# Altium PCB MB_Backup.PcbDoc
Units mm, origin at the board's own origin, x right, y up, seen from the top; angles counter-clockwise.
Board outline 160 x 154 mm, 2 copper layers (Top Layer, Bottom Layer); 49 components, 74 nets, 364 pads, 107 vias.
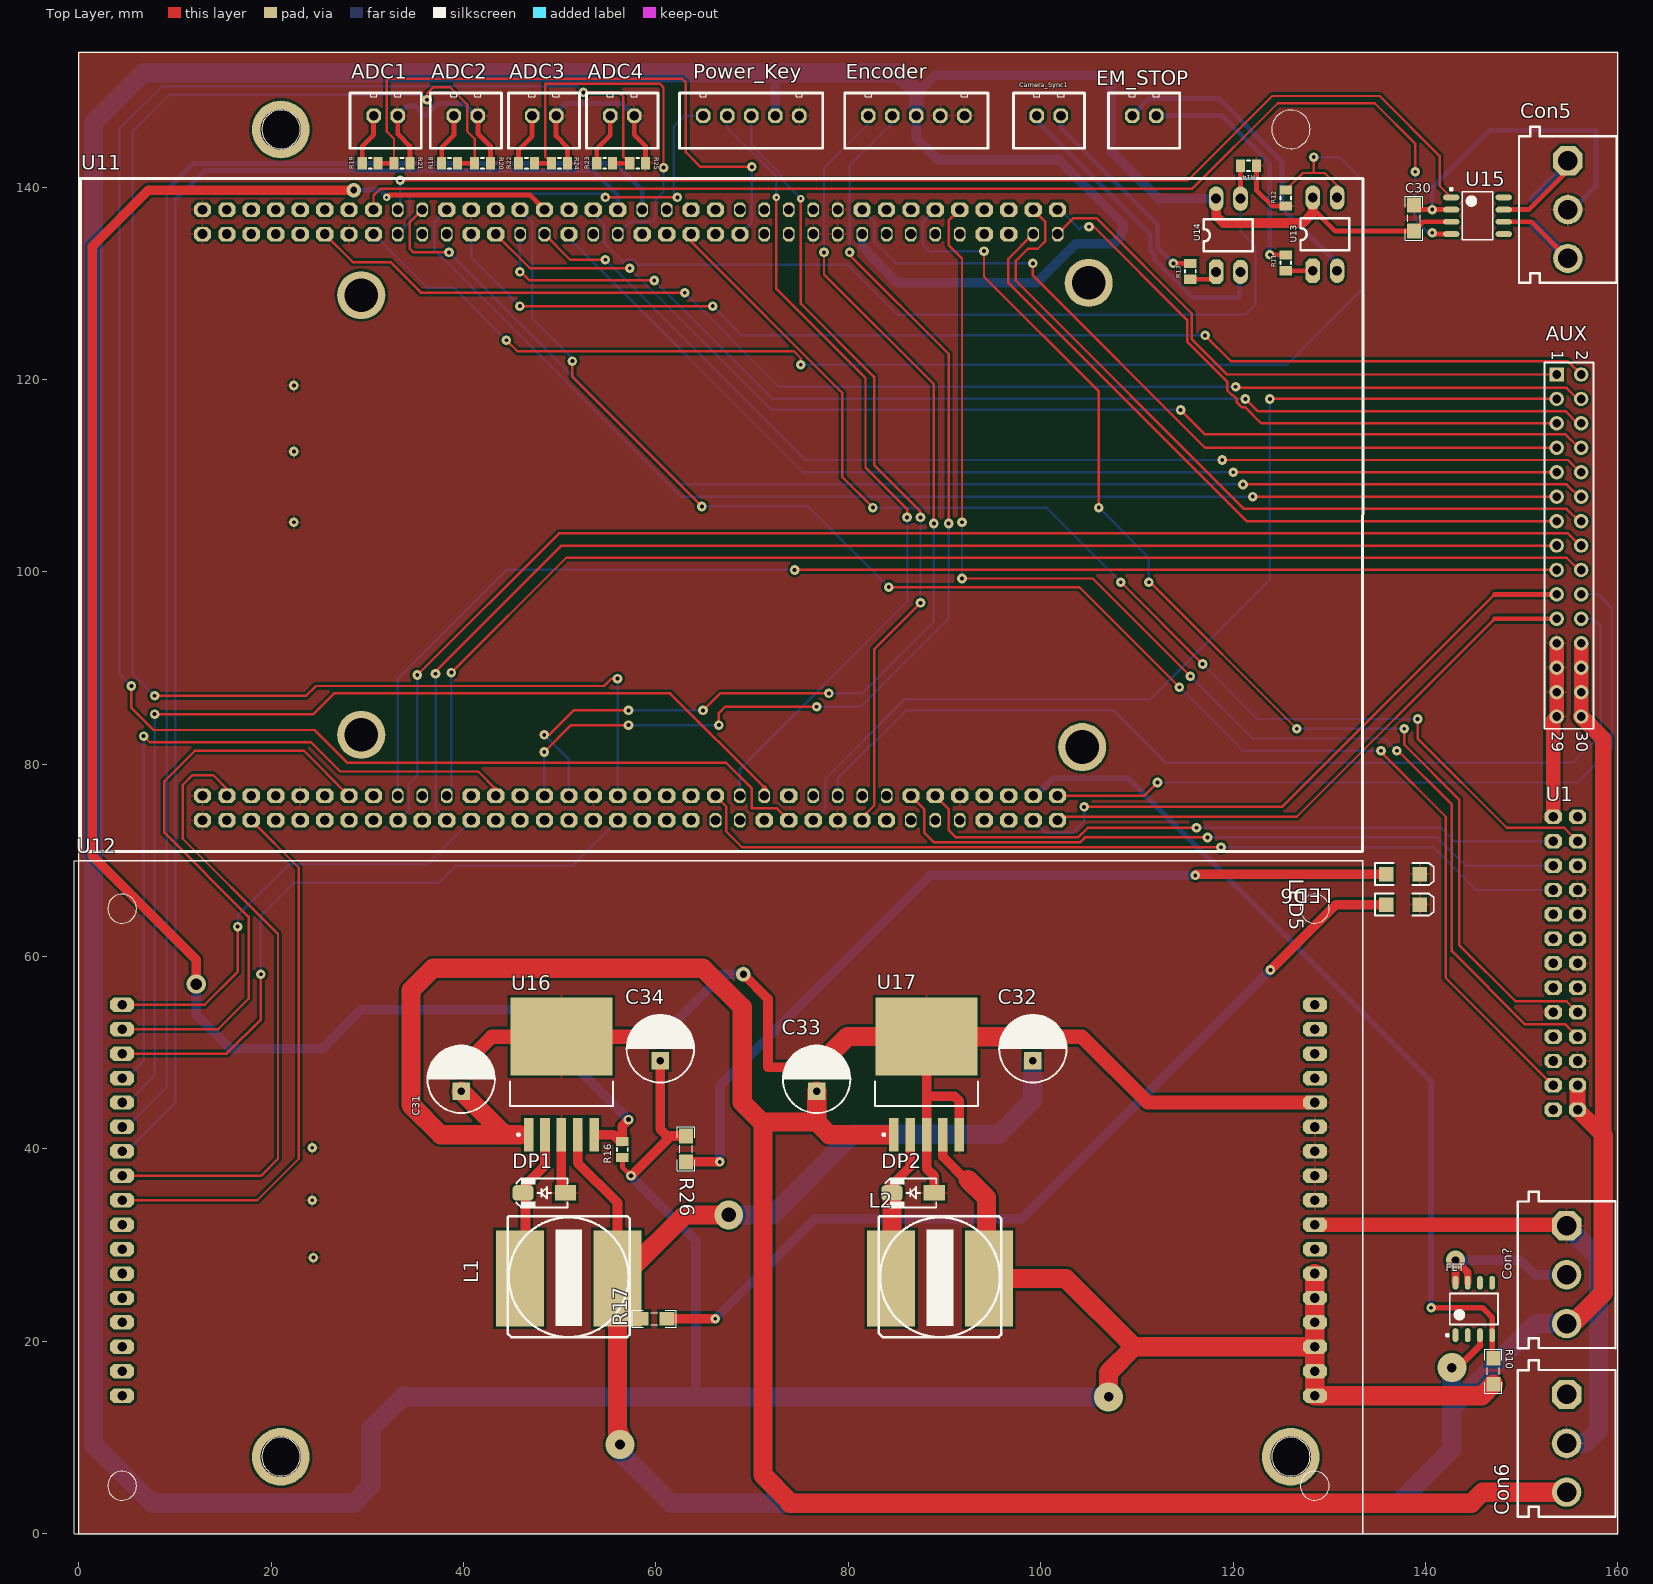
[diagram p0: Top Layer view]
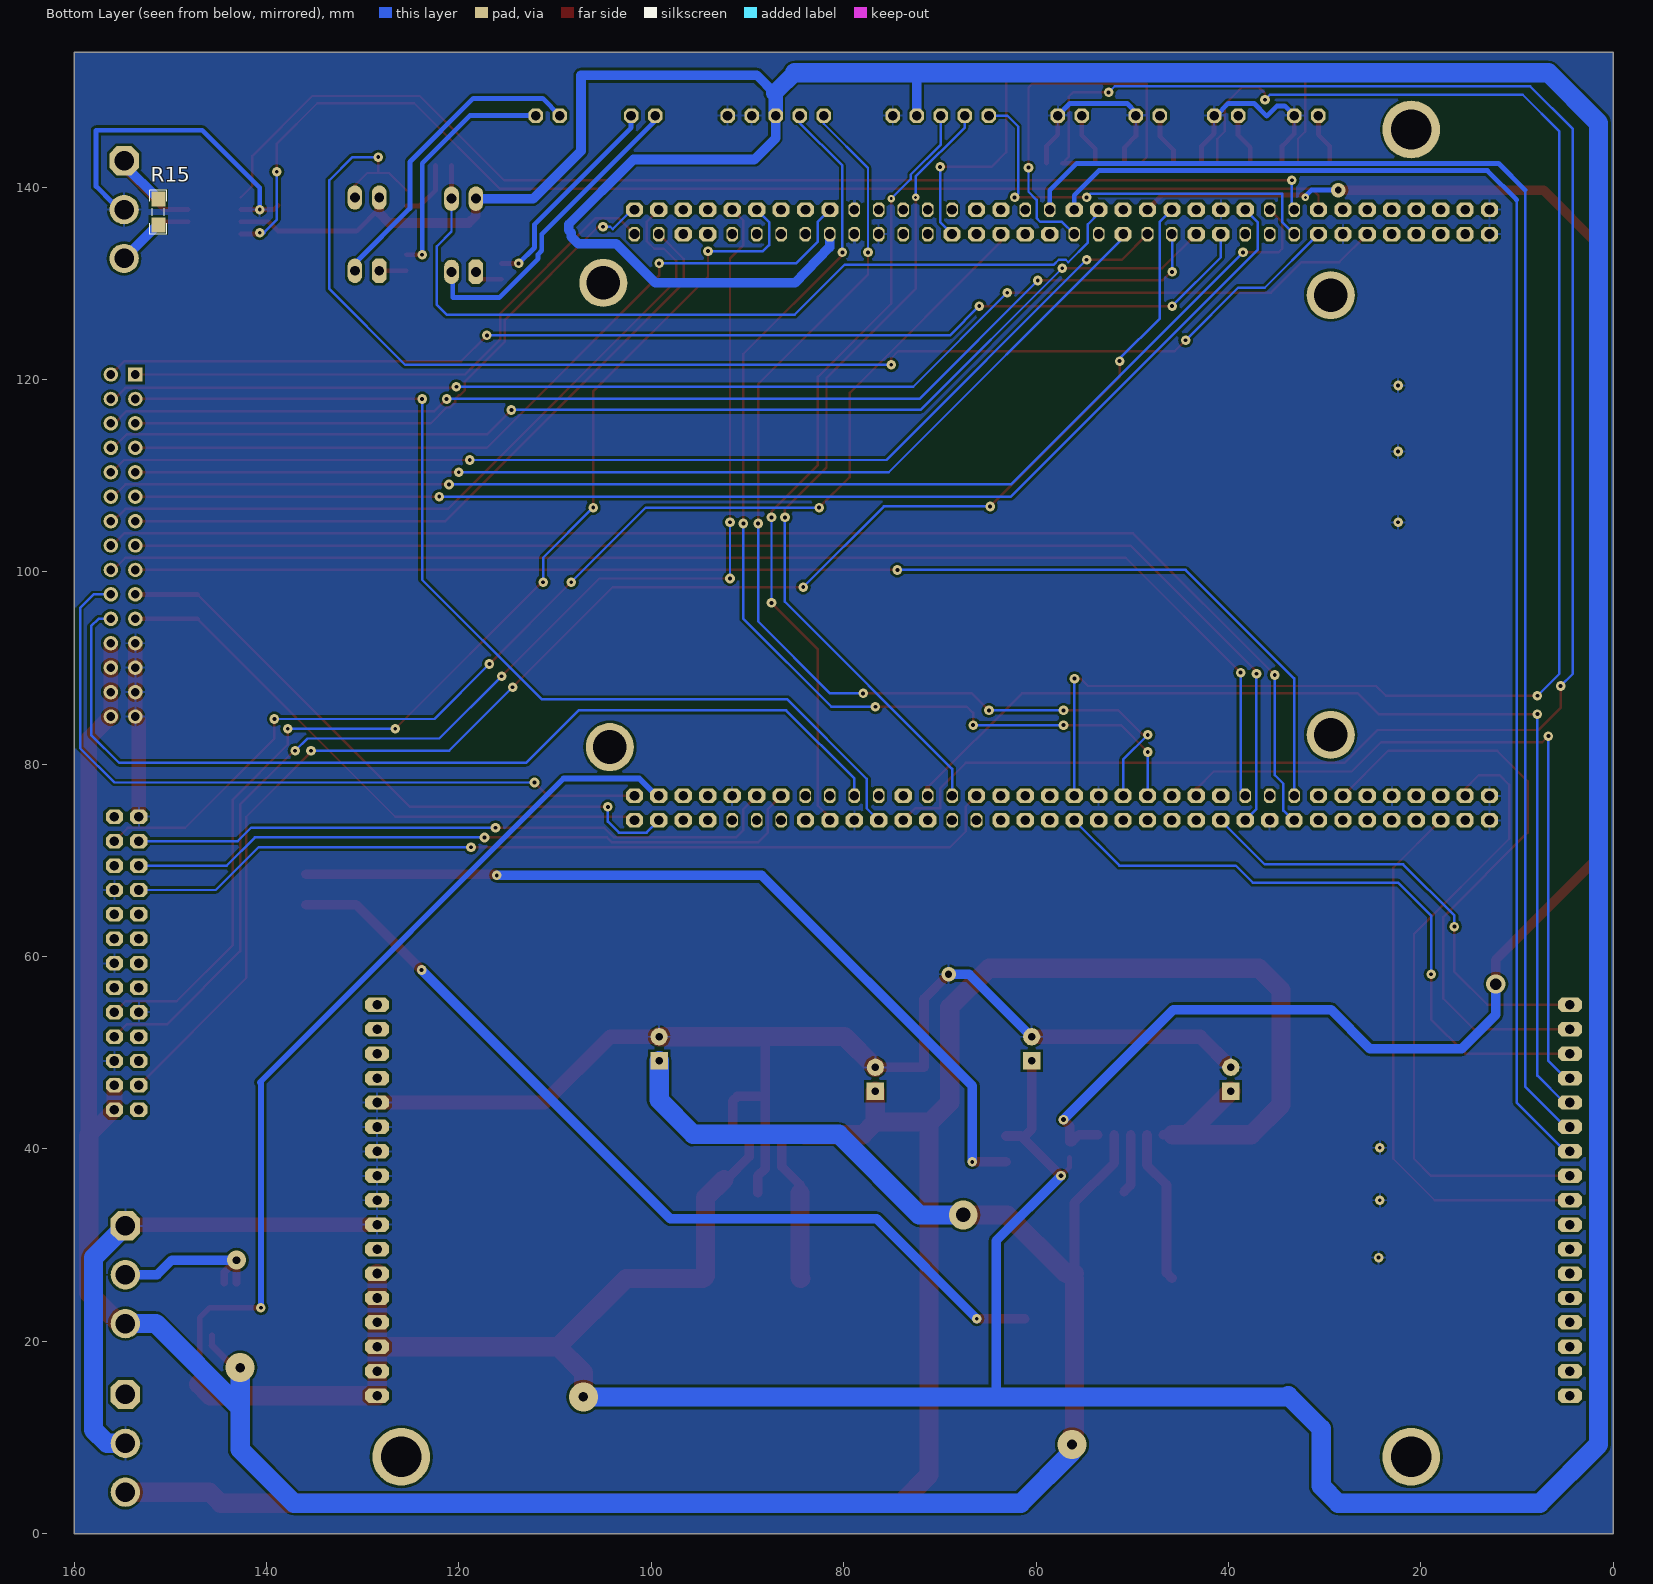
[diagram p1: Bottom Layer view, seen from below]
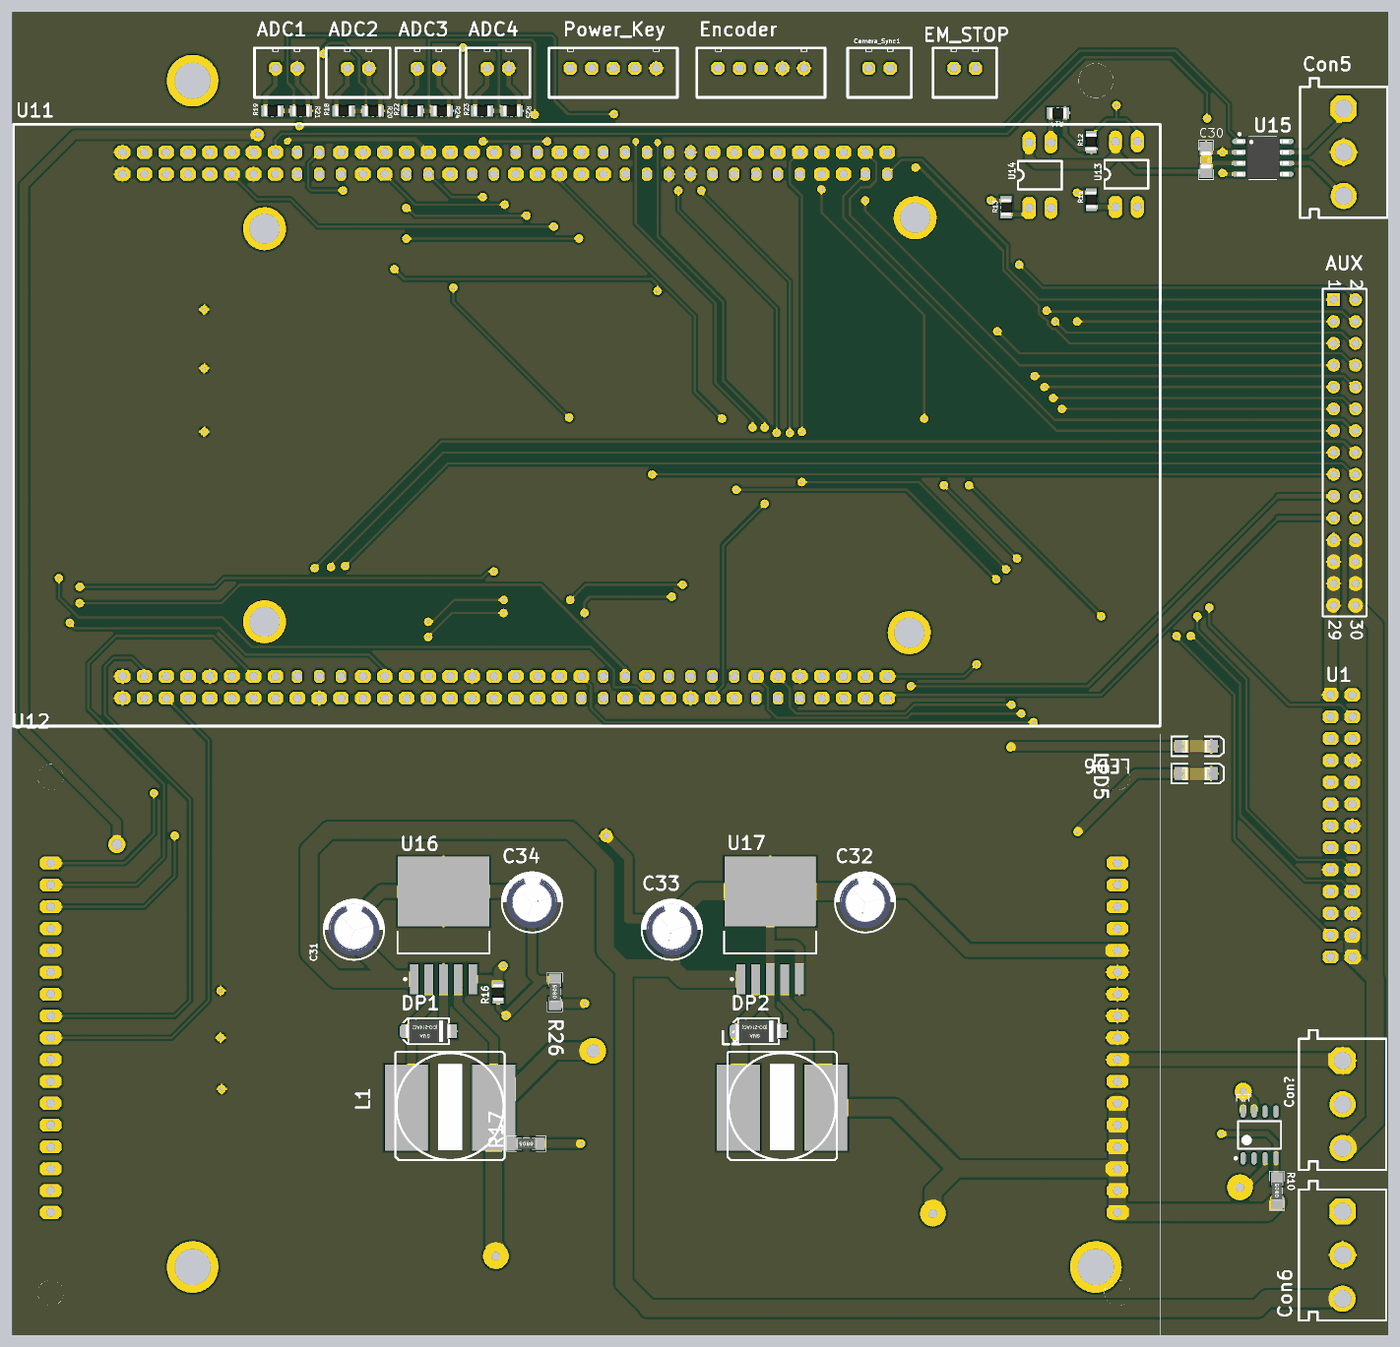
[diagram p2: 3D render of the assembled board from above, using the file's embedded part models]

## Layer stack, top to bottom
Top Solder: solder mask 0.0102, Solder Resist, Dk 3.5
Top Layer: signal copper 0.0356
Dielectric 1: dielectric 0.32, FR-4, Dk 4.8
Bottom Layer: signal copper 0.0356
Bottom Solder: solder mask 0.0102, Solder Resist, Dk 3.5

## Board outline
0.013,0.013 0.013,154.013 160.013,154.013 160.013,0.013

## Design rules (kind name [scope] priority, off if disabled: settings)
Clearance [All] p1: gap=0.254 ignorepadtopadclearanceinfootprint=FALSE except(0: Arc-Hole Track-Hole SMDPad-Hole THPad-Hole Via-Hole Fill-Hole Poly-Hole Region-Hole Text-Hole)
ComponentClearance [All] p1: gap=0 collisioncheckmode=3 verticalgap=2540 showdistances=FALSE
PolygonConnect [All] p1: connectstyle=Relief reliefconductorwidth=0.254 reliefentries=4 polygonreliefangle="90 Angle" airgapwidth=0.254
RoutingVias [All] p1: holewidth=0.711 width=1.27 viastyle="Through Hole" minholewidth=0.711 minwidth=1.27 maxholewidth=0.711 maxwidth=1.27
SolderMaskExpansion [All] p1: expansion=0.102
Width [All] p1: maxlimit=3 minlimit=0.254 preferedwidth=0.254
29 further rules are at their usual default settings.

## Components (designator, comment, footprint, x,y, rotation, side; value= is the part's Value field where it differs from the comment)
ADC1 "XH_2PIN" XH_2PIN 35.597,149.797 r180 top
ADC2 "XH_2PIN" XH_2PIN 43.939,149.797 r180 top
ADC3 "XH_2PIN" XH_2PIN 52.067,149.797 r180 top
ADC4 "XH_2PIN" XH_2PIN 60.195,149.797 r180 top
AUX "Header 15X2" HDR2X15 153.649,120.523 r270 top
C30 "0.1uF" CAPC3413X12N 138.811,136.779 r270 top
C31 "100uF50V" "Cap electrolitic radial 6x7-2.5" 39.751,47.244 r90 top
C32 "100uF50V" "Cap electrolitic radial 6x7-2.5" 99.187,50.419 r90 top
C33 "100uF50V" "Cap electrolitic radial 6x7-2.5" 76.708,47.244 r90 top
C34 "100uF50V" "Cap electrolitic radial 6x7-2.5" 60.452,50.419 r90 top
Camera_Sync1 "XH_2PIN" XH_2PIN 104.558,149.797 r180 top
Con5 "CON3 pin Green" My_CN3 159.906,145.275 r270 top
Con6 "CON3 pin Green" My_CN3 159.779,17.005 r270 top
Con? "CON3 pin Green" My_CN3 159.779,34.531 r270 top
DP1 "1N5819" 430X270D 48.387,35.433 r180 top
DP2 "1N5819" 430X270D 86.741,35.433 r180 top
EM_STOP "XH_2PIN" XH_2PIN 114.464,149.797 r180 top
Encoder "XH_5PIN" XH_5PIN 94.525,149.797 r180 top
FET "FET_20V_6A" FET_20V_6A 145.034,23.368 r90 top
L1 "Inductor" _INDUCTOR-SMD-13.0mm 50.927,26.67 r0 top value=10uH
L2 "Inductor" _INDUCTOR-SMD-13.0mm 89.535,26.67 r0 top value=10uH
LED5 "Red" "LED SMD 1206" 137.668,65.405 r0 top
LED6 "Red" "LED SMD 1206" 137.668,68.58 r0 top
Power_Key "XH_5PIN" XH_5PIN 77.347,149.797 r180 top
R10 "1K" RESC3413X04N 147.066,16.891 r90 top
R11 "470" "RES 0805 (2012X06L)" 125.476,131.318 r90 top
R12 "4.7k" "RES 0805 (2012X06L)" 125.476,139.699 r270 top
R13 "470" "RES 0805 (2012X06L)" 115.57,130.43 r90 top
R14 "4.7k" "RES 0805 (2012X06L)" 120.777,142.24 r0 top
R15 "120" RESC3413X04N 151.257,137.414 r90 bottom
R16 "4.7k" "RES 0805 (2012X06L)" 56.515,39.117 r90 top
R17 "1K" RESC3413X04N 59.817,22.352 r180 top
R18 "470" "RES 0805 (2012X06L)" 39.37,142.494 r180 top
R19 "470" "RES 0805 (2012X06L)" 31.114,142.494 r180 top
R20 "470" "RES 0805 (2012X06L)" 42.798,142.494 r180 top
R21 "470" "RES 0805 (2012X06L)" 34.417,142.494 r180 top
R22 "470" "RES 0805 (2012X06L)" 47.371,142.494 r180 top
R23 "470" "RES 0805 (2012X06L)" 55.498,142.494 r180 top
R24 "470" "RES 0805 (2012X06L)" 50.799,142.494 r180 top
R25 "470" "RES 0805 (2012X06L)" 58.928,142.494 r180 top
R26 "1K" RESC3413X04N 63.119,40.005 r90 top
U1 "5Inch_HDMI_DISPLAY" 5Inch_HDMI_DISPLAY 155.821,44.069 r90 top
U11 "F7" F7 0.247,140.793 r270 top locked
U12 "CAN_CARD" CAN_CARD 133.505,69.991 r180 top locked
U13 "Optoisolator" My_opto 128.27,131.318 r90 top
U14 "Optoisolator" My_opto 118.224,131.204 r90 top
U15 "TJA1051" SO-8N 145.415,137.033 r0 top
U16 "5V" _TO263 50.165,47.739 r90 top
U17 "5V" _TO263 88.138,47.739 r90 top

## Footprints (in the part's own frame and the unit in brackets; to place one, negate y for a bottom-side part, rotate by r counter-clockwise, add the part's x,y. Pads: shape width x height; smd on the part's side, far side on the other; paste and mask are expansions set on the pad)
5Inch_HDMI_DISPLAY [mm]
  oct 1.5x1.8 hole 1: 1(0,0) 2(2.54,0) 3(5.08,0) 4(7.62,0) 5(10.16,0) 6(12.7,0) 7(15.24,0) 8(17.78,0) 9(20.32,0) 10(22.86,0) 11(25.4,0) 12(27.94,0) 13(30.48,0) 14(0,2.54) 15(2.54,2.54) 16(5.08,2.54) 17(7.62,2.54) 18(10.16,2.54) 19(12.7,2.54) 20(15.24,2.54) 21(17.78,2.54) 22(20.32,2.54) 23(22.86,2.54) 24(25.4,2.54) 25(27.94,2.54) 26(30.48,2.54)
430X270D [mm] "SMA Molded Diode, 2-Leads, Body 4.3x2.7mm"
  rect 2.2x1.6 smd: 1(-2.2,0)
  rrect50% 2.2x1.6 smd: 2(2.2,0)
  silkscreen extent -2.4,-1.5 2.9,1.5, body extent -2.75,-1.4 2.75,1.4, height 2.6
_INDUCTOR-SMD-13.0mm [mm]
  rect 5x10 smd: 1(-5.08,-0.127) 2(5.08,-0.127)
  silkscreen extent -6.35,-6.22 6.35,6.35
_TO263 [mm] "D2-PAK, 6-Leads, Body 8.9x10.2mm, Pitch 1.7mm, Lead Span 15.2mm, IPC High Density"
  rect 3.5x1 smd: 1(-6.25,3.4) 2(-6.25,1.7) 3(-6.25,0) 4(-6.25,-1.7) 5(-6.25,-3.4)
  rect 8.1x10.6 smd: 6(3.95,0)
  silkscreen extent -6.37,-5.35 -0.7,5.35
CAN_CARD [mm]
  oct 2.5x1.5 hole 1: 1(5,15) 2(5,17.54) 3(5,20.08) 4(5,22.62) 5(5,25.16) 6(5,27.7) 7(5,30.24) 8(5,32.78) 9(5,35.32) 10(5,37.86) 11(5,40.4) 12(5,42.94) 13(5,45.48) 14(5,48.02) 15(5,50.56) 16(5,53.1) 17(5,55.64) 18(129,15) 19(129,17.54) 20(129,20.08) 21(129,22.62) 22(129,25.16) 23(129,27.7) 24(129,30.24) 25(129,32.78) 26(129,35.32) 27(129,37.86) 28(129,40.4) 29(129,42.94) 30(129,45.48) 31(129,48.02) 32(129,50.56) 33(129,53.1) 34(129,55.64)
  silkscreen extent 0.01,0.01 134.01,70.01
"Cap electrolitic radial 6x7-2.5" [mm] "Cap electrolitic radial 6x7-2.5-Design:Abbas Basereh"
  rect 1.8x1.8 hole 0.8: 1(-1.25,0)
  round 1.8 hole 0.8: 2(1.25,0)
  silkscreen extent -3.5,-3.5 3.6,3.5, body extent -3,-3 3,3, height 7.3
CAPC3413X12N [mm] "Chip Capacitor, 2-Leads, Body 3/40x1/30mm, IPC Medium Density-Design:Abbas Basereh"
  rect 1.55x1.45 smd: 1(-1.35,0) 2(1.35,0)
  silkscreen extent -2.29,-0.89 2.29,0.89, body extent -1,-0.62 1,0.63, height 0.78
F7 [mm]
  oct 1.5x1.8 hole 1: 1(3.125,12.605) 2(5.665,12.605) 3(3.125,15.145) 4(5.665,15.145) 5(3.125,17.685) 6(5.665,17.685) 7(3.125,20.225) 8(5.665,20.225) 9(3.125,22.765) 10(5.665,22.765) 11(3.125,25.305) 12(5.665,25.305) 13(3.125,27.845) 14(5.665,27.845) 15(3.125,30.385) 16(5.665,30.385) 21(3.125,38.005) 23(3.125,40.545) 24(5.665,40.545) 25(3.125,43.085) 26(5.665,43.085) 27(3.125,45.625) 29(3.125,48.165) 31(3.125,50.705) 32(5.665,50.705) 33(3.125,53.245) 35(3.125,55.785) 38(5.665,58.325) 40(5.665,60.865) 41(3.125,63.405) 42(5.665,63.405) 43(3.125,65.945) 44(5.665,65.945) 46(5.665,68.485) 55(3.125,81.185) 57(3.125,83.725) 59(3.125,86.265) 61(3.125,88.805) 63(3.125,91.345) 65(3.125,93.885) 66(5.665,93.885) 67(3.125,96.425) 68(5.665,96.425) 69(3.125,98.965) 71(3.125,101.505) 73(64.085,12.605) 74(66.625,12.605) 75(64.085,15.145) 76(66.625,15.145) 77(64.085,17.685) 78(66.625,17.685) 79(64.085,20.225) 80(66.625,20.225) 81(64.085,22.765) 82(66.625,22.765) 83(64.085,25.305) 84(66.625,25.305) 85(64.085,27.845) 86(66.625,27.845) 87(64.085,30.385) 88(66.625,30.385) 90(66.625,32.925) 92(66.625,35.465) 94(66.625,38.005) 95(64.085,40.545) 96(66.625,40.545) 97(64.085,43.085) 98(66.625,43.085) 99(64.085,45.625) 100(66.625,45.625) 101(64.085,48.165) 102(66.625,48.165) 103(64.085,50.705) 104(66.625,50.705) 105(64.085,53.245) 106(66.625,53.245) 107(64.085,55.785) 108(66.625,55.785) 109(64.085,58.325) 110(66.625,58.325) 111(64.085,60.865) 112(66.625,60.865) 113(64.085,63.405) 114(66.625,63.405) 115(64.085,65.945) 120(66.625,71.025) 121(64.085,73.565) 122(66.625,73.565) 124(66.625,76.105) 126(66.625,78.645) 128(66.625,81.185) 130(66.625,83.725) 131(64.085,86.265) 133(64.085,88.805) 135(64.085,91.345) 137(64.085,93.885) 138(66.625,93.885) 139(64.085,96.425) 140(66.625,96.425) 141(64.085,98.965) 142(66.625,98.965) 143(64.085,101.505) 144(66.625,101.505)
  oct 1.5x1.2 hole 1: 17(3.125,32.925) 18(5.665,32.925) 19(3.125,35.465) 20(5.665,35.465) 22(5.665,38.005) 28(5.665,45.625) 30(5.665,48.165) 34(5.665,53.245) 36(5.665,55.785) 37(3.125,58.325) 39(3.125,60.865) 45(3.125,68.485) 47(3.125,71.025) 48(5.665,71.025) 49(3.125,73.565) 50(5.665,73.565) 51(3.125,76.105) 52(5.665,76.105) 53(3.125,78.645) 54(5.665,78.645) 56(5.665,81.185) 58(5.665,83.725) 60(5.665,86.265) 62(5.665,88.805) 64(5.665,91.345) 70(5.665,98.965) 72(5.665,101.505) 89(64.085,32.925) 91(64.085,35.465) 93(64.085,38.005) 116(66.625,65.945) 117(64.085,68.485) 118(66.625,68.485) 119(64.085,71.025) 123(64.085,76.105) 127(64.085,81.185) 129(64.085,83.725) 132(66.625,86.265) 134(66.625,88.805) 136(66.625,91.345)
  oct 1.5x1.21 hole 1: 125(64.085,78.645)
  round 5 hole 3.5: ""(10.745,104.745) ""(12.015,29.115) ""(57.735,29.115) ""(59.005,104.065)
  silkscreen extent -0.13,-0.1 69.88,133.24
FET_20V_6A [mm] "SOIC, 8-Leads, Body 4.89x3.90mm, Pitch 1.27mm, IPC Medium Density"
  oval 1.45x0.6 smd: 1(-2.725,1.905) 2(-2.725,0.635) 3(-2.725,-0.635) 4(-2.725,-1.905) 5(2.725,-1.905) 6(2.725,-0.635) 7(2.725,0.635) 8(2.725,1.905)
  silkscreen extent -2.85,-2.5 1.6,2.88, body extent -2,-2.5 2,2.5, height 1.75
HDR2X15 [mm] "Connector; Header; 15x2 Position"
  rect 1.5x1.5 hole 0.9: 1(0,0)
  round 1.5 hole 0.9: 2(0,2.54) 3(2.54,0) 4(2.54,2.54) 5(5.08,0) 6(5.08,2.54) 7(7.62,0) 8(7.62,2.54) 9(10.16,0) 10(10.16,2.54) 11(12.7,0) 12(12.7,2.54) 13(15.24,0) 14(15.24,2.54) 15(17.78,0) 16(17.78,2.54) 17(20.32,0) 18(20.32,2.54) 19(22.86,0) 20(22.86,2.54) 21(25.4,0) 22(25.4,2.54) 23(27.94,0) 24(27.94,2.54) 25(30.48,0) 26(30.48,2.54) 27(33.02,0) 28(33.02,2.54) 29(35.56,0) 30(35.56,2.54)
  silkscreen extent -1.27,-1.27 36.83,3.81
"LED SMD 1206" [mm]
  rect 1.5x1.5 smd: 1(-1.75,0) 2(1.75,0)
  silkscreen extent -2.9,-1.15 3.2,1.15, body extent -1.65,-0.76 1.65,0.69, height 1.36
My_CN3 [mil]
  oct 120x120 hole 80: 1(99.5,-200.5)
  round 120 hole 80: 2(299.5,-200.5) 3(499.5,-200.5)
  silkscreen extent -40,-400 600,0
My_opto [mil]
  oct 100x60 hole 40: 1(-0.5,-0.5)
  oval 100x60 hole 40: 2(-0.5,-100.5) 3(299.5,-0.5) 4(299.5,-100.5)
  silkscreen extent 84,-150 214,50
"RES 0805 (2012X06L)" [mm] "Chip Resistor, 2-Leads, Body 2.0x1.3mm, IPC High Density _ (0.100 W)"
  rect 0.95x1.3 smd: 1(0,0) 2(1.65,0)
  silkscreen extent 0.67,-0.55 0.97,0.55, body extent -0.19,-0.63 1.84,0.64, height 0.6
RESC3413X04N [mm] "Chip Resistor, 2-Leads, Body 3/40x1/30mm, IPC Medium Density-Design:Abbas Basereh"
  rect 1.55x1.45 smd: 1(-1.35,0) 2(1.35,0)
  silkscreen extent -2.29,-0.89 2.29,0.89, body extent -1.25,-0.62 1.25,0.62, height 0.79
SO-8N [mm] "SOIC, 8-Leads, Body 4/89x3/90mm, Pitch 1/27mm, IPC Medium Density designer:abbas basereh"
  oval 1.7x0.6 smd mask+0.06: 1(-2.725,1.905) 2(-2.725,0.635) 3(-2.725,-0.635) 4(-2.725,-1.905) 5(2.725,-1.905) 6(2.725,-0.635) 7(2.725,0.635) 8(2.725,1.905)
  silkscreen extent -2.85,-2.5 1.6,2.88, body extent -3,-2.5 3,2.5, height 1.5
XH_2PIN [mm]
  oct 1.5x1.5 hole 1: 1(2.45,2.35) 2(4.95,2.35)
  silkscreen extent 0,0 7.4,5.75
XH_5PIN [mm]
  oct 1.5x1.5 hole 1: 1(2.45,2.35) 2(4.95,2.35) 3(7.45,2.35) 4(9.95,2.35) 5(12.45,2.35)
  silkscreen extent 0,0 14.9,5.75

## Part data
AUX: "Header, 15-Pin, Dual row", LatestRevisionDate=17-Jul-2002, LatestRevisionNote="Re-released for DXP Platform.", Publisher="Altium Limited"
C30: library part "CAP SMD 0805", "CAP 0805", Data=16-12-2016, Desc.="CAP SMD 0805", Designer="Abbas Basereh"
C31 C32 C33 C34: library part "Cap ELECTROLITIC TOTAL SIZE", "Cap electrolitic radial", Data=16-12-2016, Designer="Abbas Basereh"
Con5 Con6 Con?: "Connector green screw"
DP1 DP2: "Schottkey Rectifiers", Data=16-12-2016, Designer="Abbas Basereh"
LED5 LED6: library part LED, "LED", Adding Date=1387/12/22, Color=Red, Designer="Saeid Jorablo", Organazation=ControTec, Size="SMD 1206"
R10 R15 R17 R26: library part "RES 0805 0.125W", "RES 0805", Data=16-12-2016, Desc.="RES SMD 0805", Designer="Abbas Basereh"
R11 R12 R13 R14 R16 R18 R19 R20 R21 R22 R23 R24 R25: library part Resistor, "Resistor"
U16 U17: library part LM2576, "Buck Step Down Regulator with 4.75 to 60 V Input and 15 V Output, -40 to 125 degC, 5-Pin DDPAK/TO-263 (KTT), Green (RoHS & no Sb/Br)"

## Free pads (board coordinates)
  round 6 hole 4.2: ""(21,8) ""(21,146) ""(126,8)

## Via types
v1: diameter 1, hole 0.4, Top Layer to Bottom Layer, 94 vias
v2: diameter 0.8, hole 0.3, Top Layer to Bottom Layer, 3 vias
v3: diameter 3, hole 1, Top Layer to Bottom Layer, 3 vias
v4: diameter 1, hole 0.5, Top Layer to Bottom Layer, 2 vias
v5: diameter 1.5, hole 0.7, Top Layer to Bottom Layer, 1 vias
v6: diameter 1.5, hole 0.75, Top Layer to Bottom Layer, 1 vias
v7: diameter 3, hole 1.5, Top Layer to Bottom Layer, 1 vias
v8: diameter 2, hole 0.8, Top Layer to Bottom Layer, 1 vias
v9: diameter 2, hole 1.2, Top Layer to Bottom Layer, 1 vias

## Nets (pads, with @x,y where several pads share a name; then routed paths per layer and width w, separated by ;. In a path a pad name is that pad's centre, name@x,y a point inside that pad or via, vN(x,y) a via of type N, cw(c..) or ccw(c..) an arc to the next point about the centre after c; other vN are vias at no path point)
+5: C30.2 C34.1 Encoder.3 L2.2 Power_Key.2 R10.1 R16.1 R26.2 U11.56 U12.12 U12.13 U12.14 U12.15 U12.16 U12.17 U13.3 U14.3 U15.3 U17.4 | length 617.7
  Top Layer w0.5: R16.1 56.515,38.1 v4(57.404,37.211) ; U13.3@128.283,137.782 130.636,135.429 C30.2 139.78,136.398 U15.3
  Top Layer w1: v4(57.404,37.211) 61.341,41.148 ; C34.1 60.452,42.037 61.341,41.148 ; R26.2 61.548,41.355 61.341,41.148 ; U17.4 89.838,39.194 92.202,36.83 92.456,36.83 ; U14.3 118.237,137.033 118.999,136.271 127.254,136.271 128.283,137.3 128.283,137.782 U13.3
  Top Layer w2: 92.456,36.83 94.361,34.925 94.361,26.797 L2.2 102.616,26.543 109.728,19.431 ; v3(107.061,14.224) 107.061,16.764 109.728,19.431 ; U12.12 U12.13 U12.14 U12.15 ; R10.1 145.876,14.351 U12.17 U12.16 U12.15 ; 109.728,19.431 U12.15
  Bottom Layer w1: v4(57.404,37.211) 64.135,30.48 64.135,14.224 ; 72.263,151.892 cw(c72.263,151.758) 72.397,151.758 Power_Key.2 ; U11.56 81.432,133.833 ccw(c81.534,133.833) 81.534,133.731 85.057,130.048 99.568,130.048 103.632,134.112 107.569,134.112 108.331,134.874 108.331,135.255 108.585,135.509 108.585,136.144 101.854,142.875 89.281,142.875 87.075,145.081 Encoder.3 ; 87.185,149.796 89.027,151.638 107.315,151.638 107.315,143.764 112.268,138.811 U14.3
  Bottom Layer w1.5: Encoder.3 87.075,149.907
  Bottom Layer w1.75: 85.09,151.892 87.075,149.907 87.185,149.796
  Bottom Layer w2: 85.09,151.892 72.263,151.892 6.731,151.892 1.524,146.685 1.524,9.271 7.62,3.175 28.575,3.175 30.353,4.953 30.353,10.922 33.782,14.351 33.909,14.224 64.135,14.224 v3(107.061,14.224)
+12V: C31.1 C33.1 Con6.3 U16.1 U17.1 | length 220.8
  Top Layer w1: 45.807,41.489 U16.1 ; 84.074,41.489 U17.1
  Top Layer w2: C31.1 43.962,41.783 ; 45.807,41.489 37.632,41.489 34.544,44.577 34.544,56.515 36.83,58.801 64.897,58.801 68.961,54.737 68.961,44.831 70.993,42.799 ; C33.1 76.708,42.799 ; 84.074,41.489 78.018,41.489 76.708,42.799 ; Con6.3 145.923,4.318 144.78,3.175 73.914,3.175 73.914,3.302 71.12,6.096 71.12,42.672 70.993,42.799 ; 70.993,42.799 76.708,42.799
ADC1_IN0: R19.1 R21.2 U11.46 | length 64.2
  Top Layer w0.254: R21.2 32.767,145.03 32.016,145.781 32.016,151.257 62.738,151.257 63.119,150.876 63.119,143.637 64.643,142.113 v1(69.977,142.113)
  Top Layer w0.5: R19.1 R21.2
  Bottom Layer w0.254: U11.46 69.977,136.373 v1(69.977,142.113)
ADC1_IN3: R18.1 R20.2 U11.107 | length 167.1
  Top Layer w0.254: v1(7.874,87.122) 23.622,87.122 24.638,88.138 54.61,88.138 55.372,88.9 v1(56.007,88.9) ; v1(36.195,149.098) 36.195,149.733 36.83,150.368 38.608,150.368 40.358,148.618 40.358,145.821 41.148,145.031 R20.2
  Top Layer w0.5: R18.1 R20.2
  Bottom Layer w0.254: v1(7.874,87.122) 5.588,89.408 5.588,145.796 9.398,149.606 35.687,149.606 v1(36.195,149.098) ; v1(56.007,88.9) 56.007,76.733 U11.107
ADC1_IN9: R23.1 R25.2 U11.122 | length 198.8
  Top Layer w0.254: v1(5.461,88.138) 5.461,85.852 7.747,83.566 24.511,83.566 27.94,80.137 67.31,80.137 69.977,77.47 69.977,75.438 72.517,75.438 73.787,74.168 U11.122 ; v1(52.451,149.86) 56.158,149.86 56.614,149.404 56.614,143.158 R25.2
  Top Layer w0.5: R23.1 R25.2
  Bottom Layer w0.254: v1(5.461,88.138) 4.191,89.408 4.191,146.05 8.636,150.495 51.816,150.495 v1(52.451,149.86)
ADC1_IN10: R22.1 R24.2 U11.36 | length 41.3
  Top Layer w0.254: R24.2 48.486,143.157 48.486,150.749 60.404,150.749 60.785,150.368 v1(60.785,142.034)
  Top Layer w0.5: R22.1 R24.2
  Bottom Layer w0.254: U11.36 57.302,136.398 59.563,136.398 59.944,136.779 59.944,138.684 60.785,139.525 v1(60.785,142.034)
AUX_GPIO1: AUX.19 U11.142 | length 66.1
  Top Layer w0.254: v1(104.521,75.565) 125.095,75.565 147.193,97.663
  Top Layer w0.5: 147.193,97.663 AUX.19
  Bottom Layer w0.254: U11.142 100.482,72.898 103.378,72.898 104.521,74.041 v1(104.521,75.565)
AUX_GPIO2: AUX.20 U11.143 | length 78.1
  Top Layer w0.254: U11.143 110.744,76.708 v1(112.141,78.105)
  Bottom Layer w0.254: v1(112.141,78.105) 155.829,78.105 159.385,81.661 159.385,96.266 157.988,97.663 AUX.20
AUX_GPIO3: AUX.21 U11.144 | length 60.6
  Top Layer w0.254: U11.144@102.133,74.549 126.619,74.549 147.193,95.123
  Top Layer w0.5: U11.144 U11.144@102.133,74.549 ; 147.193,95.123 AUX.21
AUX_GPIO4: AUX.22 U11.125 | length 101.2
  Bottom Layer w0.254: U11.125 78.892,78.511 85.979,85.598 107.569,85.598 113.03,80.137 155.321,80.137 158.242,83.058 158.242,94.361 157.48,95.123 AUX.22
AUX_GPIO5: AUX.9 U11.32 | length 113.2
  Top Layer w0.254: v1(120.015,110.363) AUX.9
  Bottom Layer w0.254: U11.32 50.952,134.722 75.311,110.363 v1(120.015,110.363)
AUX_GPIO6: AUX.10 U11.30 | length 118
  Top Layer w0.254: U11.30 51.079,132.461 v1(54.737,132.461) ; v1(118.872,111.633) 154.813,111.633 156.083,110.363 AUX.10
  Bottom Layer w0.254: v1(54.737,132.461) 75.565,111.633 v1(118.872,111.633)
BL_EN: FET.4 R10.2 U11.141 | length 89.9
  Top Layer w0.6: v1(140.589,23.495) 145.923,23.495 146.939,22.479 FET.4 146.939,18.368 R10.2
  Bottom Layer w0.6: U11.141 99.441,76.708 101.244,78.511 109.118,78.511 140.716,46.914 140.589,46.787 v1(140.589,23.495)
BL_PW: Con?.2 FET.7 FET.8 | length 17.4
  Top Layer w0.8: FET.8 v8(143.129,28.448) 144.399,27.178 FET.7
  Bottom Layer w1: v8(143.129,28.448) 149.86,28.448 151.384,26.924 Con?.2
CAM_SYNC: R14.1 U11.33 U14.4 | length 90.4
  Top Layer w0.5: U14.4 R14.1
  Bottom Layer w0.254: U11.33 53.492,137.262 54.61,136.144 54.61,134.239 56.654,132.195 56.912,132.453 57.642,132.453 58.142,131.953 79.883,131.953 85.09,126.746 121.285,126.746 122.301,127.762 122.301,133.858 120.777,135.382 U14.4
CAN1_RX: U11.15 U15.4 | length 127.7
  Top Layer w0.254: U11.15 30.632,139.123 31.337,139.827 115.747,139.827 124.645,148.725 134.739,148.725 138.938,144.526 v1(138.938,141.605)
  Top Layer w0.5: v1(140.716,135.255) 140.843,135.128 U15.4
  Bottom Layer w0.254: v1(138.938,141.605) 138.938,136.652 v1@140.335,135.255
  Bottom Layer w0.5: v1@140.335,135.255 v1(140.716,135.255)
CAN1_TX: U11.17 U15.1 | length 122.2
  Top Layer w0.254: v1(33.401,140.716) 115.316,140.716 124.079,149.479 135.255,149.479 141.478,143.256 141.478,140.15 U15.1
  Bottom Layer w0.254: U11.17 33.401,137.897 v1(33.401,140.716)
CS1: U11.97 U12.21 | length 76.4
  Top Layer w0.254: v1(6.731,82.931) 7.366,82.296 24.13,82.296 27.178,79.248 41.529,79.248 U11.97@43.332,77.445
  Top Layer w0.5: U11.97 U11.97@43.332,77.445
  Bottom Layer w0.254: U12.21@4.953,47.371 6.731,49.149 v1(6.731,82.931)
  Bottom Layer w0.5: U12.21 U12.21@4.953,47.371
CS2: U11.96 U12.18 | length 47.7
  Top Layer w0.254: U12.18 13.081,54.991 16.51,58.42 v1(16.51,63.119)
  Bottom Layer w0.254: v1(16.51,63.119) 16.51,64.262 21.844,69.596 36.22,69.596 U11.96
CS3: U11.85 U12.19 | length 63.2
  Top Layer w0.254: U12.19 14.478,52.451 17.653,55.626 17.653,64.135 8.89,72.898 8.89,78.232 12.065,81.407 23.393,81.407 U11.85
CS4: U11.108 U12.20 | length 67.9
  Top Layer w0.254: U12.20 15.367,49.911 18.923,53.467 v1(18.923,58.166)
  Bottom Layer w0.254: v1(18.923,58.166) 18.923,64.262 22.352,67.691 37.465,67.691 39.243,69.469 51.333,69.469 U11.108
EM_STOP: R12.1 U11.16 U13.4 | length 139.1
  Top Layer w0.254: v1(44.45,124.079) 45.593,122.936 74.339,122.936 75.057,122.218 v1(75.057,121.539) ; R12.1 127.255,141.478 128.27,141.478 ; v1(128.397,143.129) 128.397,141.605 128.27,141.478 ; U13.4 130.823,140.195 129.54,141.478 128.27,141.478
  Bottom Layer w0.254: U11.16 36.22,129.54 38.989,129.54 v1(44.45,124.079) ; v1(75.057,121.539) 125.603,121.539 133.477,129.413 133.477,140.716 131.064,143.129 v1(128.397,143.129)
GND: ADC1.1 ADC2.1 ADC3.1 ADC4.1 AUX.23 AUX.25 AUX.27 AUX.29 C30.1 C31.2 C32.2 C33.2 C34.2 Con5.2 Con6.2 Con?.1 DP1.1 DP2.1 Encoder.1 Encoder.2 LED5.2 LED6.2 Power_Key.1 R12.2 R14.2 R20.1 R21.1 R24.1 R25.1 U1.3 U1.7 U1.10 U1.18 U1.26 U11.1 U11.2 U11.14 U11.23 U11.52 U11.53 U11.54 U11.73 U11.74 U11.81 U11.92 U11.105 U11.126 U11.135 U12.5 U12.6 U12.7 U12.8 U12.9 U12.10 U15.2 U16.3 U16.6 U17.3 U17.5 U17.6 | length 289.1
  Top Layer w0.5: ADC1.1 33.147,145.542 34.417,144.272 R21.1 ; ADC2.1 41.489,145.582 42.798,144.273 R20.1 ; ADC3.1 49.617,145.328 50.799,144.146 R24.1 ; ADC4.1 57.745,145.455 58.928,144.272 R25.1 ; R14.2 122.427,139.701 124.079,138.049 R12.2 ; C30.1 139.272,137.668 v1(140.716,137.668) U15.2
  Top Layer w1: U16.3 50.165,36.236 DP1.1@50.841,35.56 ; v6(69.088,58.166) 71.648,55.606 71.648,48.494 C33.2 ; U17.6@88.158,51.669 U17.6 88.138,45.466 ; DP2.1 88.941,37.17 88.138,37.973 U17.3 88.138,45.466 ; U17.5 91.538,44.987 91.059,45.466 88.138,45.466
  Top Layer w1.5: C31.2 42.946,51.689 U16.6 60.432,51.689 C34.2 ; C32.2 104.287,51.669 111.125,44.831 U12.5 ; U12.10@128.251,32.131 U12.10 Con?.1@154.305,32.131 ; U1.26 153.281,84.595 AUX.29 AUX.27 AUX.25 AUX.23
  Top Layer w2: C33.2 79.903,51.689 U17.6 ; U17.6@88.158,51.669 C32.2
  Bottom Layer w0.5: ADC1.1 34.147,148.447 34.941,148.447 36.005,147.383 37.338,148.717 40.005,148.717 41.275,147.447 ADC2.1 ; ADC3.1 49.617,147.788 50.53,148.701 56.491,148.701 ADC4.1 ; v1(140.716,137.668) 140.716,139.954 146.685,145.923 157.734,145.923 157.734,140.081 155.956,138.303 155.448,138.303 Con5.2
  Bottom Layer w1: C34.2 66.949,58.166 v6(69.088,58.166)
  Bottom Layer w2: Con6.2 156.591,9.398 157.988,10.795 157.988,28.702 Con?.1
  other v1: 24.384,28.702 24.257,34.671 24.257,40.132 22.352,105.156 22.352,112.522 22.352,119.38
I2C_SCL: AUX.11 U11.21 | length 132
  Top Layer w0.254: v1(122.047,107.823) AUX.11
  Bottom Layer w0.254: U11.21 36.957,136.373 36.957,133.477 62.611,107.823 v1(122.047,107.823)
I2C_SDA: AUX.12 U11.19 | length 137.1
  Top Layer w0.254: U11.19 34.417,136.373 34.417,133.604 34.798,133.223 v1(38.481,133.223) ; v1(121.031,109.093) 154.686,109.093 155.956,107.823 AUX.12
  Bottom Layer w0.254: v1(38.481,133.223) 62.611,109.093 v1(121.031,109.093)
NetADC1_2: ADC1.2 R19.2 | length 5.4
  Top Layer w0.5: R19.2 29.464,144.272 30.647,145.455 ADC1.2
NetADC2_2: ADC2.2 R18.2 | length 5.5
  Top Layer w0.5: R18.2 37.72,144.146 38.989,145.415 ADC2.2
NetADC3_2: ADC3.2 R22.2 | length 5.5
  Top Layer w0.5: R22.2 45.721,143.892 47.117,145.288 ADC3.2
NetADC4_2: ADC4.2 R23.2 | length 5.5
  Top Layer w0.5: R23.2 53.848,144.018 55.245,145.415 ADC4.2
NetCamera_Sync1_1: Camera_Sync1.1 R13.2 | length 22
  Top Layer w0.5: v1(113.792,132.08) R13.2
  Bottom Layer w0.5: Camera_Sync1.1 102.108,146.177 112.141,136.144 112.141,133.731 v1(113.792,132.08)
NetCamera_Sync1_2: Camera_Sync1.2 U14.2 | length 33.2
  Bottom Layer w0.5: Camera_Sync1.2 99.608,146.899 111.387,135.12 111.387,133.419 111.77,133.036 111.77,132.578 115.824,128.524 120.65,128.524 120.65,131.064 U14.2
NetCon5_1: Con5.1 R15.2 U15.7 | length 14.8
  Top Layer w0.5: U15.7 150.749,137.668 154.813,141.732 Con5.1
  Bottom Layer w1: R15.2 154.813,142.32 Con5.1
NetCon5_3: Con5.3 R15.1 U15.6 | length 13.2
  Top Layer w0.5: U15.6 151.003,136.398 Con5.3
  Bottom Layer w1: R15.1 151.337,136.064 Con5.3
NetDP1_2: DP1.2 L1.1 U16.2 | length 16
  Top Layer w1: L1.1 46.441,27.137 46.441,36.281 48.465,38.305 U16.2
NetDP2_2: DP2.2 L2.1 U17.2 | length 15.8
  Top Layer w1: DP2.2 84.541,36.281 86.438,38.178 U17.2
  Top Layer w2: L2.1 84.541,26.629 DP2.2
NetEM_STOP_1: EM_STOP.1 R11.2 | length 25
  Top Layer w0.5: v1(123.826,132.968) R11.2
  Bottom Layer w0.5: EM_STOP.1 118.872,147.447 123.826,142.493 v1(123.826,132.968)
NetEM_STOP_2: EM_STOP.2 U13.2 | length 32.7
  Bottom Layer w0.5: EM_STOP.2 111.292,149.225 118.491,149.225 125.095,142.621 125.095,137.795 130.823,132.067 U13.2
NetLED5_1: LED5.1 R17.1 | length 92.8
  Top Layer w0.6: R17.1 R17.1@61.294,22.479
  Top Layer w1: R17.1 v1(66.167,22.352) ; v1(123.888,58.61) 130.683,65.405 LED5.1
  Bottom Layer w1: v1(66.167,22.352) 76.581,32.766 98.044,32.766 v1(123.888,58.61)
NetLED6_1: LED6.1 R26.1 | length 89.8
  Top Layer w1: R26.1 v1(66.628,38.655) ; v1(116.078,68.453) 116.205,68.58 LED6.1
  Bottom Layer w1: v1(66.628,38.655) 66.628,46.562 88.519,68.453 v1(116.078,68.453)
NetR11_1: R11.1 U13.1 | length 2.8
  Top Layer w0.5: R11.1 125.489,131.305 U13.1
NetR13_1: R13.1 U14.1 | length 3.4
  Top Layer w0.5: R13.1 118.237,130.43 U14.1
RPi_5V: AUX.24 AUX.26 AUX.28 AUX.30 C32.1 Con?.3 FET.3 L1.2 R17.2 U1.1 U1.2 U16.4 | length 289
  Top Layer w0.5: v3(142.748,17.272) v3@143.383,17.272
  Top Layer w0.6: 145.669,19.558 FET.3
  Top Layer w0.75: v3@143.383,17.272 145.669,19.558
  Top Layer w1: U16.4 51.865,38.559 56.007,34.417 L1.2@56.007,27.051
  Top Layer w1.5: AUX.30 AUX.28 AUX.26 AUX.24
  Top Layer w1.7: U1.2 U1.1 158.496,41.394 158.496,82.656 AUX.30
  Top Layer w2: L1.2 56.007,10.541 56.261,10.287 v3(56.261,9.271) ; L1.2@56.007,27.051 56.896,27.051 62.992,33.147 v7(67.564,33.147) ; Con?.3 155.321,21.844 158.496,25.019 158.496,41.394
  Bottom Layer w2: v3(56.261,9.271) 56.261,8.509 61.595,3.175 137.16,3.175 142.748,8.763 142.748,13.081 ; v7(67.564,33.147) 72.136,33.147 80.518,41.529 95.631,41.529 99.187,45.085 C32.1 ; v3(142.748,17.272) 142.748,13.081 ; Con?.3 151.511,21.844 142.748,13.081
RPi_PW_EN: R16.2 U11.29 U16.5 | length 193.4
  Top Layer w0.5: v2(32.004,138.938) 32.258,139.192 46.888,139.192 U11.29
  Top Layer w1: v9(12.192,57.15) 12.192,59.69 1.397,70.485 1.397,133.858 7.239,139.7 v5(28.575,139.7) ; U16.5 55.539,41.489 56.261,40.767 R16.2 56.515,42.418 v4(57.15,43.053)
  Bottom Layer w0.5: v5(28.575,139.7) 31.369,139.7 v2@32.004,139.065
  Bottom Layer w1: v9(12.192,57.15) 12.192,53.975 15.748,50.419 25.273,50.419 29.337,54.483 45.72,54.483 v4(57.15,43.053)
RPi_SPW: U1.15 U11.27 | length 162.1
  Top Layer w0.254: v1(51.308,121.92) 51.308,120.269 v1(64.77,106.807) ; v1(84.201,98.425) 104.013,98.425 v1(114.427,88.011) ; v1@135.636,81.534 135.636,81.026 142.113,74.549 142.113,57.777 U1.15
  Bottom Layer w0.254: U11.27 47.117,136.423 47.117,126.365 51.308,122.174 v1(51.308,121.92) ; v1(64.77,106.807) 75.819,106.807 v1(84.201,98.425) ; v1(114.427,88.011) 121.031,81.407 v1(135.382,81.407)
SPI1_MISO: U1.24 U11.131 | length 71.6
  Top Layer w0.254: U11.131 87.884,75.336 87.884,72.898 88.9,71.882 104.096,71.882 104.604,72.39 v1(117.348,72.39)
  Bottom Layer w0.254: v1(117.348,72.39) 141.224,72.39 144.145,69.469 U1.24
SPI1_MOSI: U1.23 U11.115 | length 92.6
  Top Layer w0.254: U11.115 67.31,75.59 67.31,73.025 68.961,71.374 v1(118.745,71.374)
  Bottom Layer w0.254: v1(118.745,71.374) 140.843,71.374 145.288,66.929 U1.23
SPI1_NSS: U1.12 U11.42 | length 124.9
  Top Layer w0.254: U11.42 63.652,134.341 79.375,118.618 79.375,109.855 v1(82.55,106.68) ; v1(108.331,98.933) v1(116.84,90.424) ; v1(139.192,84.709) 139.192,82.677 148.463,73.406 154.424,73.406 U1.12
  Bottom Layer w0.254: v1(82.55,106.68) 100.584,106.68 v1(108.331,98.933) ; v1@116.967,90.297 122.555,84.709 v1(139.192,84.709)
SPI1_SCK: U1.25 U11.133 | length 68.3
  Top Layer w0.254: U11.133 90.424,75.336 90.424,73.152 91.186,72.39 103.886,72.39 104.902,73.406 v1(116.205,73.406)
  Bottom Layer w0.254: v1(116.205,73.406) 141.605,73.406 143.002,72.009 U1.25
SPI2_MISO: U11.37 U12.23 | length 153.3
  Bottom Layer w0.254: U12.23@4.953,42.291 9.144,46.482 9.144,139.7
  Bottom Layer w0.5: U12.23 U12.23@4.953,42.291 ; 9.144,139.7 11.918,142.474 55.773,142.474 58.572,139.675 U11.37
SPI2_MOSI: U11.35 U12.24 | length 151.3
  Bottom Layer w0.254: U12.24@5.207,40.005 10.033,44.831 10.033,138.684
  Bottom Layer w0.5: U12.24 4.759,40.005 U12.24@5.207,40.005 ; 10.033,138.684 13.069,141.72 53.479,141.72 56.032,139.167 U11.35
SPI2_SCK: U11.119 U12.22 | length 111.3
  Top Layer w0.254: v1(7.874,85.217) 24.384,85.217 26.543,87.376 61.468,87.376 71.272,77.572
  Top Layer w0.5: U11.119 71.272,77.572
  Bottom Layer w0.254: U12.22@5.08,44.831 7.874,47.625 v1(7.874,85.217)
  Bottom Layer w0.5: U12.22 U12.22@5.08,44.831
SPI3_MISO: AUX.1 U11.72 | length 60.9
  Top Layer w0.254: U11.72 103.403,136.779 105.791,136.779 115.729,126.841 115.729,124.174 119.38,120.523 AUX.1
SPI3_MOSI: AUX.3 U11.124 | length 108.3
  Top Layer w0.254: v1(123.825,117.983) AUX.3
  Bottom Layer w0.254: U11.124 77.597,75.413 77.597,78.486 85.852,86.741 111.379,86.741 123.825,99.187 v1(123.825,117.983)
SPI3_NSS: AUX.7 U11.55 | length 84.4
  Top Layer w0.254: v1(99.187,132.08) 99.187,130.81 117.094,112.903 AUX.7
  Bottom Layer w0.254: U11.55 82.677,136.423 82.677,134.366 84.963,132.08 v1(99.187,132.08)
SPI3_SCK: AUX.5 U11.71 | length 63.4
  Top Layer w0.254: v1(105.029,135.89) 105.537,135.89 115.221,126.206 115.221,123.964 119.388,119.797 119.388,118.888 119.904,118.372 120.007,118.372 120.404,117.975 120.404,117.618 120.92,117.102 121.277,117.102 122.936,115.443 AUX.5
  Bottom Layer w0.254: U11.71 101.981,137.668 104.013,135.636 104.267,135.89 v1(105.029,135.89)
SPI4_MISO: AUX.2 U11.24 | length 122.9
  Top Layer w0.254: v1(45.847,127.635) v1(65.913,127.635) ; v1(117.094,124.587) 119.761,121.92 154.792,121.92 AUX.2
  Bottom Layer w0.254: U11.24 40.792,132.69 v1(45.847,127.635) ; v1(65.913,127.635) 68.961,124.587 v1(117.094,124.587)
SPI4_MOSI: AUX.4 U11.12 | length 138.4
  Top Layer w0.254: U11.12 28.473,132.207 32.385,132.207 35.56,129.032 v1(62.992,129.032) ; v1(120.269,119.253) 120.015,119.253 120.269,118.999 120.269,119.126 154.686,119.126 155.829,117.983 AUX.4
  Bottom Layer w0.254: v1(62.992,129.032) 72.771,119.253 v1(120.269,119.253)
SPI4_NSS: AUX.8 U11.26 | length 122.1
  Top Layer w0.254: U11.26 46.888,131.572 v1(57.277,131.572) ; v1(114.554,116.84) 117.094,114.3 154.559,114.3 155.956,112.903 AUX.8
  Bottom Layer w0.254: v1(57.277,131.572) 72.009,116.84 v1(114.554,116.84)
SPI4_SCK: AUX.6 U11.28 | length 120.8
  Top Layer w0.254: v1@45.91,131.255 46.863,130.302 v1(59.817,130.302) ; v1(121.285,117.983) 122.555,116.713 154.559,116.713 155.829,115.443 AUX.6
  Bottom Layer w0.254: v1(45.847,131.191) 45.847,135.103 U11.28 ; v1(59.817,130.302) 72.136,117.983 v1(121.285,117.983)
SYNC1: U11.75 U12.25 | length 66.2
  Top Layer w0.254: U12.25 18.923,37.211 20.701,38.989 20.701,62.357 10.795,72.263 10.795,77.851 11.811,78.867 13.97,78.867 15.392,77.445 U11.75
SYNC2: U11.78 U12.26 | length 57.4
  Top Layer w0.254: U12.26 18.542,34.671 22.86,38.989 22.86,69.24 U11.78
TIM1_CH1: AUX.15 U11.94 | length 138
  Top Layer w0.254: v1(37.084,89.408) 37.084,89.662 50.165,102.743 AUX.15
  Bottom Layer w0.254: v1(37.084,89.408) 37.084,75.336 U11.94
TIM1_CH2: AUX.16 U11.90 | length 143.6
  Top Layer w0.254: v1(35.179,89.281) 49.911,104.013 154.813,104.013 156.083,102.743 AUX.16
  Bottom Layer w0.254: U11.90 33.274,74.168 34.29,75.184 34.29,77.978 35.179,78.867 v1(35.179,89.281)
TIM1_CH3: AUX.17 U11.89 | length 137.4
  Top Layer w0.254: v1(74.422,100.203) AUX.17
  Bottom Layer w0.254: U11.89 33.172,88.925 44.45,100.203 v1(74.422,100.203)
TIM1_CH4: AUX.18 U11.93 | length 136
  Top Layer w0.254: v1(38.735,89.535) 50.673,101.473 154.686,101.473 AUX.18@155.956,100.203
  Top Layer w0.5: AUX.18@155.956,100.203 AUX.18
  Bottom Layer w0.254: U11.93 38.735,77.191 v1(38.735,89.535)
TIM2_CH4: Power_Key.3 U11.128 | length 83.1
  Top Layer w0.254: v2(75.057,138.811) 75.057,127.889 82.677,120.269 82.677,111.125 87.503,106.299 v1(87.503,105.664) ; U11.128 81.432,74.447 82.677,75.692 82.677,91.948 v1(87.503,96.774)
  Bottom Layer w0.254: Power_Key.3 69.897,144.435 73.025,141.307 73.025,140.843 v2(75.057,138.811) ; v1(87.503,96.774) v1(87.503,105.664)
TIM3_CH1: Power_Key.4 U11.117 | length 85.7
  Top Layer w0.254: v2(72.517,138.938) 72.517,129.413 81.788,120.142 81.788,110.871 86.106,106.553 v1(86.106,105.664)
  Bottom Layer w0.254: Power_Key.4 67.397,146.217 72.517,141.097 v2(72.517,138.938) ; U11.117 68.732,79.527 86.106,96.901 v1(86.106,105.664)
TIM4_CH1: Encoder.4 U11.101 | length 111.5
  Top Layer w0.254: v1(48.387,81.28) 51.181,84.074 v1(57.15,84.074) ; v1(66.548,84.074) 66.548,85.344 67.183,85.979 v1(76.708,85.979) ; v1(80.137,133.223) 80.137,132.969 90.424,122.682 v1(90.424,105.029)
  Bottom Layer w0.254: v1(48.387,81.28) 48.387,76.733 U11.101 ; v1(57.15,84.074) v1(66.548,84.074) ; v1(76.708,85.979) 81.28,85.979 90.424,95.123 v1(90.424,105.029) ; v1(80.137,133.223) 80.137,142.24 84.575,146.678 Encoder.4
TIM4_CH2: Encoder.5 U11.103 | length 112
  Top Layer w0.254: v1(48.387,83.058) 48.895,83.058 51.435,85.598 v1(57.15,85.598) ; v1(64.897,85.598) 66.675,87.376 v1(77.978,87.376) ; v1(77.47,133.223) 77.47,130.937 88.9,119.507 v1(88.9,105.029)
  Bottom Layer w0.254: v1(48.387,83.058) 50.952,80.493 U11.103 ; v1(57.15,85.598) v1(64.897,85.598) ; v1(77.47,133.223) 77.47,141.986 82.075,146.591 Encoder.5 ; v1(77.978,87.376) 81.407,87.376 88.9,94.869 v1(88.9,105.029)
TIM14_CH1: Power_Key.5 U11.18 | length 43.7
  Top Layer w0.254: v1(54.737,138.938) v1(62.23,138.938)
  Bottom Layer w0.254: U11.18 34.417,136.373 34.417,139.319 54.356,139.319 v1(54.737,138.938) ; v1(62.23,138.938) 61.849,139.319 61.849,146.304 62.992,147.447 Power_Key.5
UART5_RX: AUX.13 U11.70 | length 73.4
  Top Layer w0.254: U11.70 96.647,132.563 96.647,130.048 121.412,105.283 AUX.13
UART5_TX: AUX.14 U11.69 | length 78.9
  Top Layer w0.254: U11.69 100.457,136.423 100.457,134.366 99.695,133.604 98.679,133.604 97.409,132.334 97.409,130.302 121.158,106.553 154.686,106.553 155.956,105.283 AUX.14
UART7_RX: U1.4 U11.63 | length 132.2
  Top Layer w0.254: v1@91.567,99.314 v1(91.821,99.314) 105.41,99.314 v1(115.57,89.154) ; U11.63 91.567,137.668 90.424,136.525 90.424,133.985 91.821,132.588 v1(91.821,105.156) ; v1(137.033,81.407) 137.16,81.407 142.748,75.819 142.748,60.579 150.368,52.959 154.551,52.959 U1.4
  Bottom Layer w0.254: v1(91.821,99.314) v1(91.821,105.156) ; v1@115.697,89.027 122.047,82.677 135.763,82.677 v1(137.033,81.407)
UART7_TX: U1.5 U11.61 | length 125.3
  Top Layer w0.254: v1(94.107,133.35) 94.107,130.683 106.045,118.745 v1(106.045,106.68) ; v1@111.252,99.06 v1(126.619,83.693) ; v1(137.795,83.693) 137.795,82.042 143.51,76.327 143.51,61.214 149.36,55.364 154.686,55.364 U1.5
  Bottom Layer w0.254: U11.61 87.757,136.373 87.757,133.985 88.392,133.35 v1(94.107,133.35) ; v1(106.045,106.68) 111.252,101.473 v1(111.252,98.933) ; v1(126.619,83.693) v1(137.795,83.693)
pads on no net: Con6.1 FET.1 FET.2 FET.5 FET.6 U1.6 U1.8 U1.9 U1.11 U1.13 U1.14 U1.16 U1.17 U1.19 U1.20 U1.21 U1.22 U11. U11.3 U11.4 U11.5 U11.6 U11.7 U11.8 U11.9 U11.10 U11.11 U11.13 U11.20 U11.22 U11.25 U11.31 U11.34 U11.38 U11.39 U11.40 U11.41 U11.43 U11.44 U11.45 U11.47 U11.48 U11.49 U11.50 U11.51 U11.57 U11.58 U11.59 U11.60 U11.62 U11.64 U11.65 U11.66 U11.67 U11.68 U11.76 U11.77 U11.79 U11.80 U11.82 U11.83 U11.84 U11.86 U11.87 U11.88 U11.91 U11.95 U11.98 U11.99 U11.100 U11.102 U11.104 U11.106 U11.109 U11.110 U11.111 U11.112 U11.113 U11.114 U11.116 U11.118 U11.120 U11.121 U11.123 U11.127 U11.129 U11.130 U11.132 U11.134 U11.136 U11.137 U11.138 U11.139 U11.140 U12.1 U12.2 U12.3 U12.4 U12.11 U12.27 U12.28 U12.29 U12.30 U12.31 U12.32 U12.33 U12.34 U15.5 U15.8

## Polygon pours and split planes (outlines as drawn)
GND on Bottom Layer "P1" (solid, remove dead copper, pour order 4): 0,153.924 0,0 160.02,0 160.02,154.051
GND on Top Layer "P1" (solid, remove dead copper, pour order 6): 0,154.051 0,0 160.02,0 160.02,154.051

## Silkscreen, mask and mechanical layers (free items; w line width, h text height)
Top Overlay:
  circle w0.025: c21.013,8.013 r2
  circle w0.025: c126.013,8.013 r2
  circle w0.025: c126.013,146.013 r2
  circle w0.025: c21.013,146.013 r2
  lines w0.025: 0.013,0.013 160.013,0.013 160.013,154.013 0.013,154.013 0.013,0.013 ; 0.013,0.013 133.513,0.013 133.513,70.013 0.013,70.013 0.013,0.013 ; 0.013,71.013 133.513,71.013 133.513,141.013 0.013,141.013 0.013,71.013

## Text inside footprints (layer, text, board x,y; h text height)
AUX: Top Overlay "1" at 153.141,123.063 h1.27 r270; Top Overlay "2" at 155.681,123.063 h1.27 r270; Top Overlay "29" at 153.141,83.439 h1.27 r270; Top Overlay "30" at 155.681,83.439 h1.27 r270